# EAGLE board BeanCounter-Panel-for-3DM (EAGLE 9.6.2), part 1 of 2
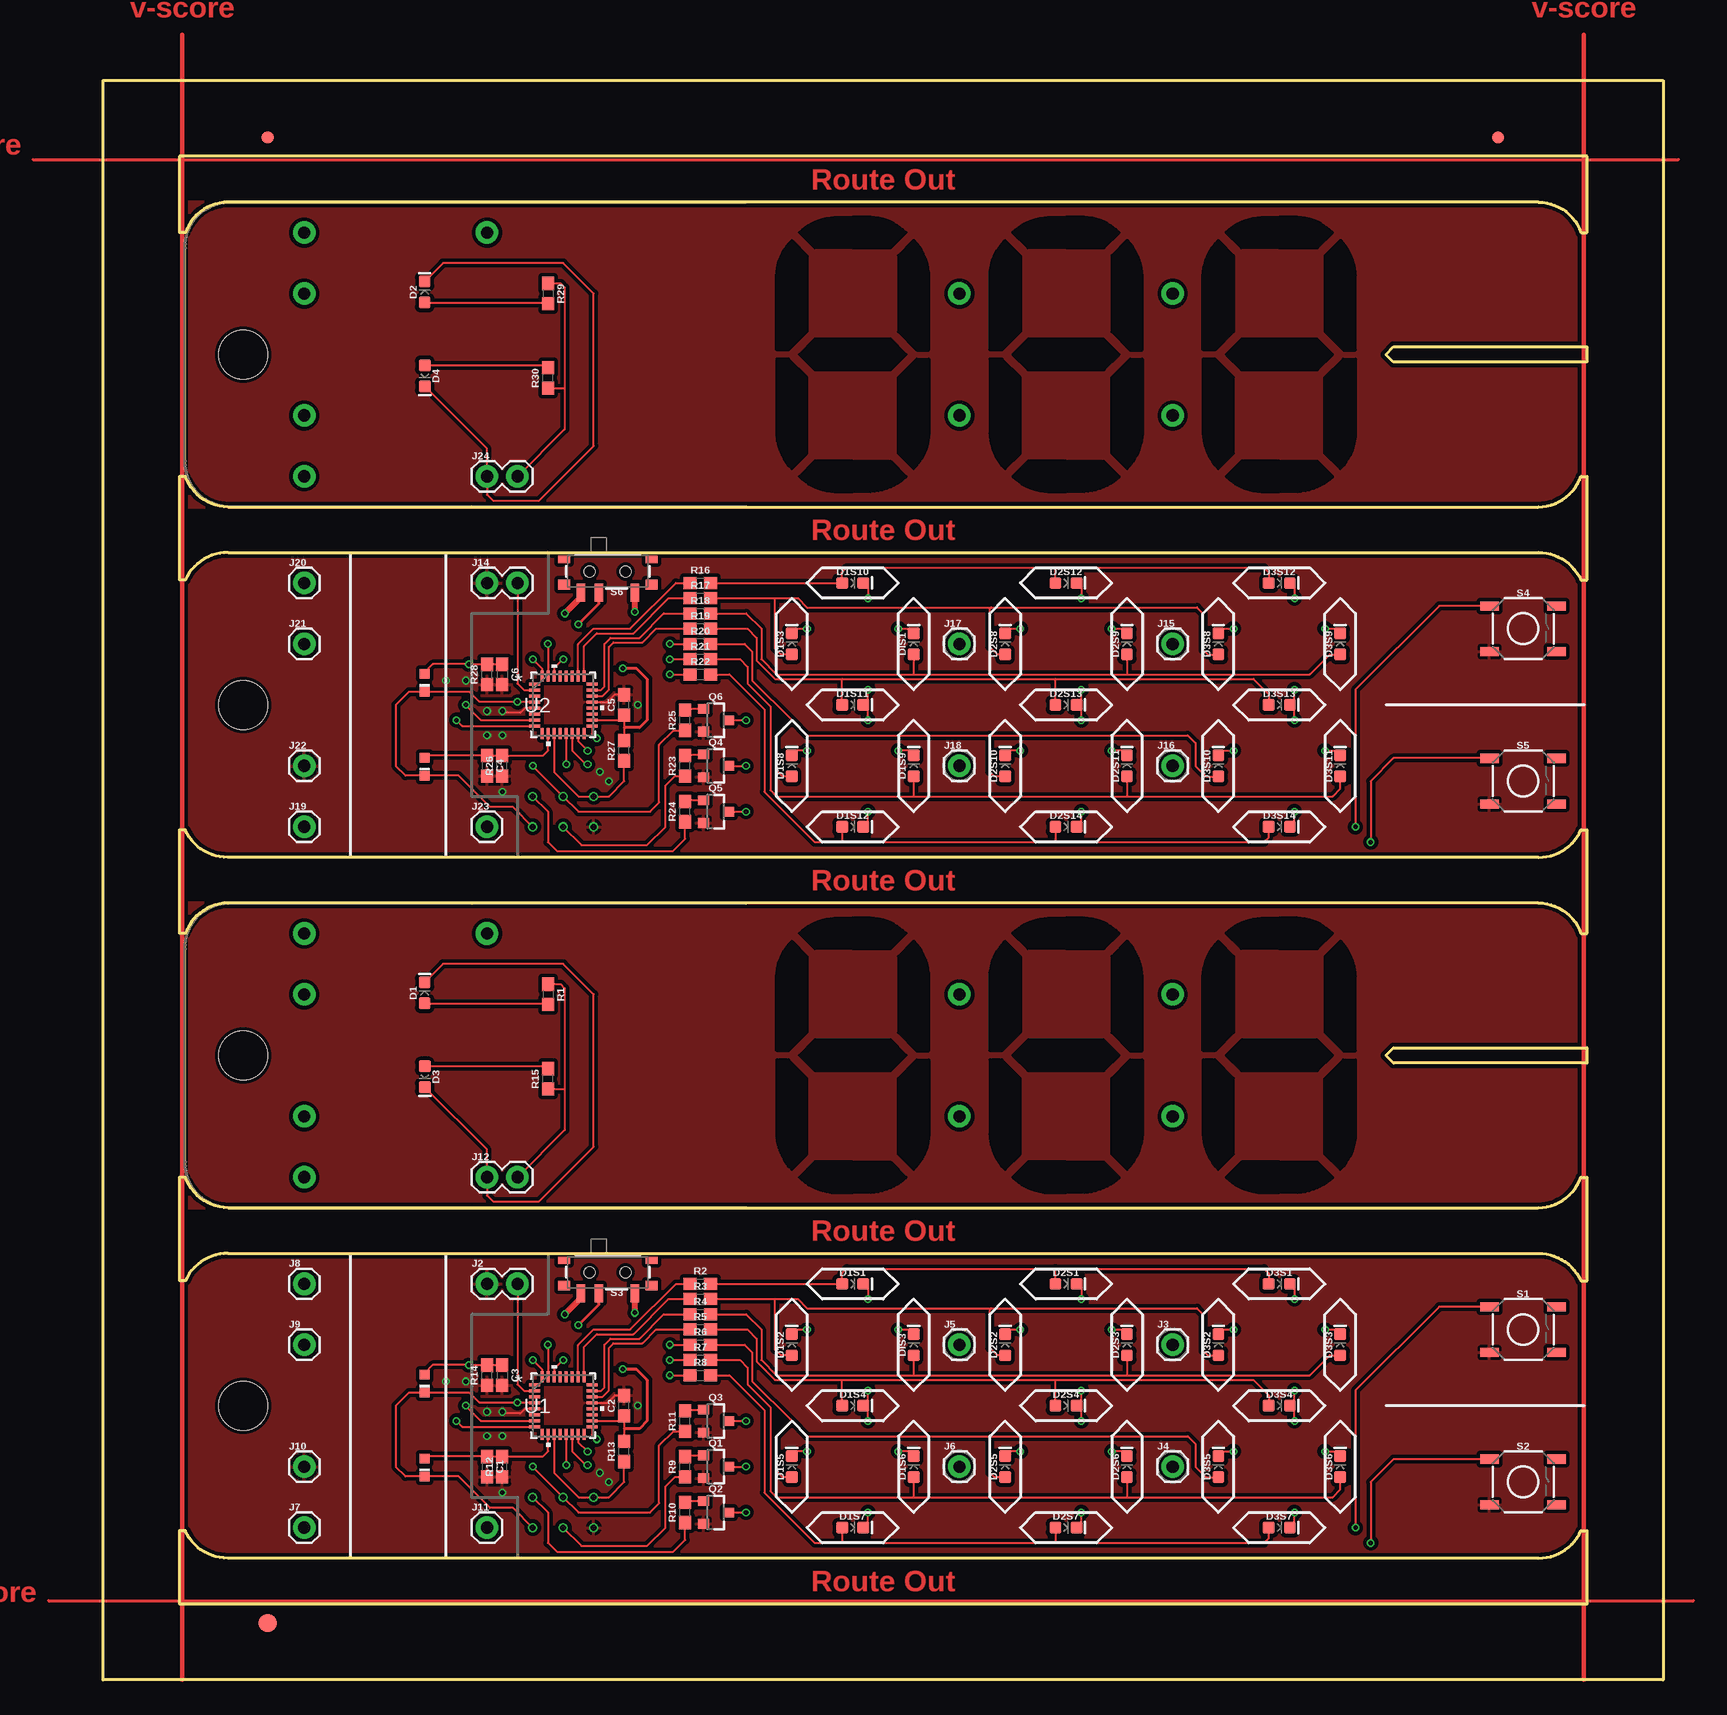
[diagram p0: board, top side]
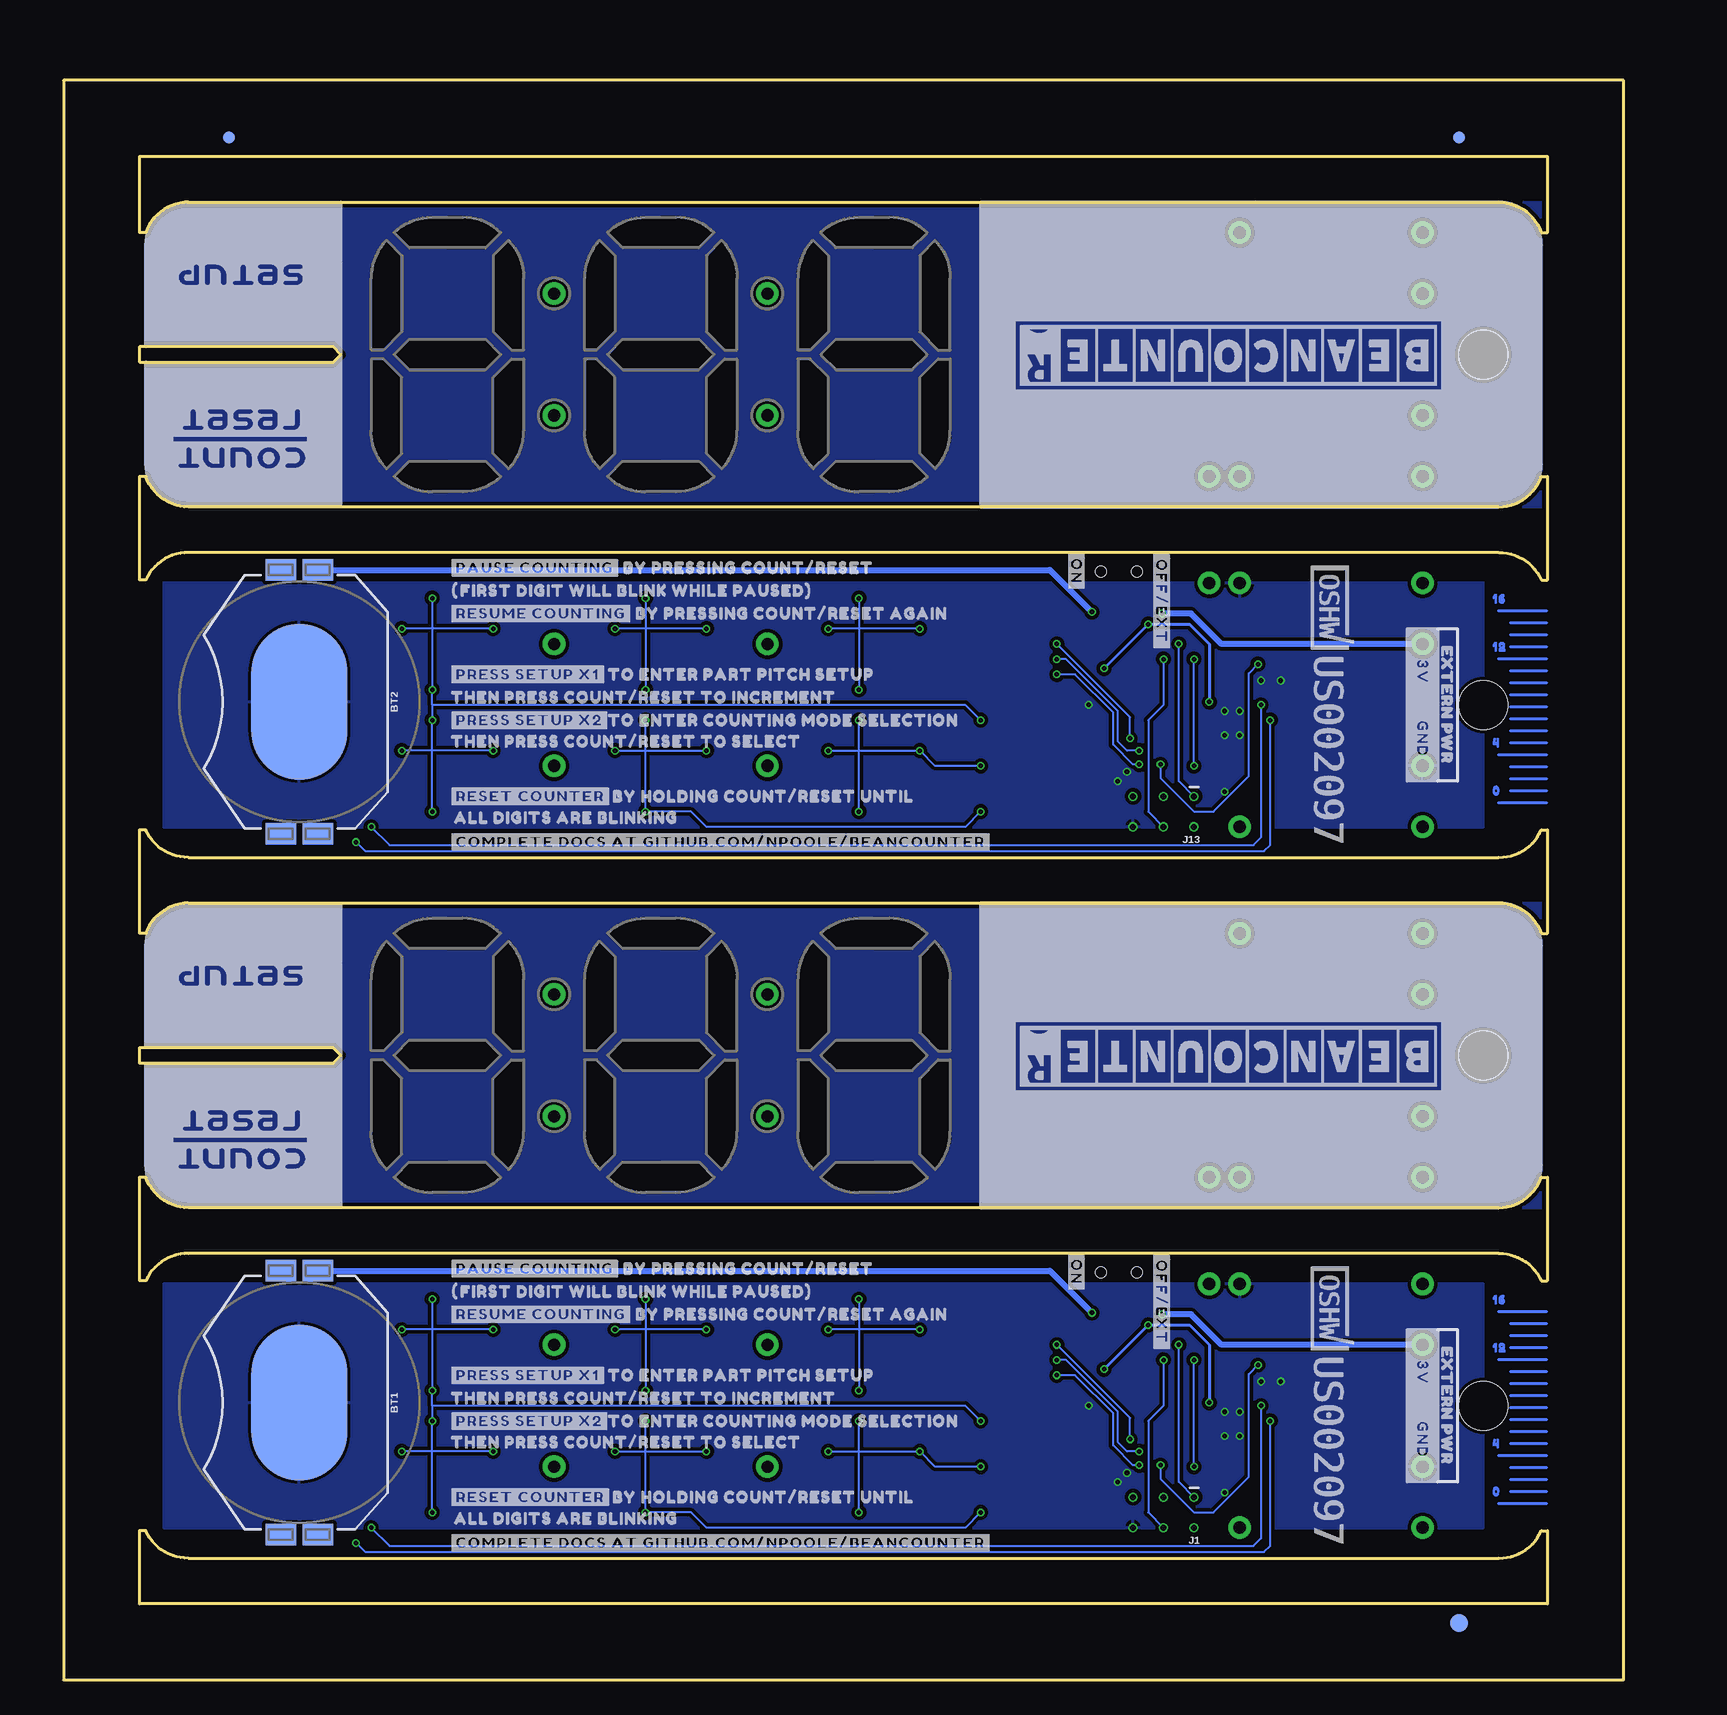
[diagram p1: board, bottom side, seen from below]

Size 130.05 x 133.35 mm. Coordinates in mm from the lower left corner, seen from the top.
Outline: 30.73,39.37 53.59,39.37
Outline: 53.59,64.77 30.73,64.77
Outline: 30.73,97.79 53.59,97.79
Outline: 53.59,123.19 30.73,123.19
Outline: 10.41,35.56 119.63,35.56 arc-67 123.19,33.27 123.7,33.27 123.7,41.91 123.19,41.91 arc-70 119.63,39.37 10.41,39.37 arc-70 6.86,41.91 6.35,41.91 6.35,33.27 6.86,33.27 arc-67 10.41,35.56
Outline: 119.63,10.16 10.41,10.16 arc-67 6.86,12.45 6.35,12.45 6.35,6.35 123.7,6.35 123.7,12.45 123.19,12.45 arc-67 119.63,10.16
Outline: 119.63,64.77 10.41,64.77 arc70 6.86,62.23 6.35,62.23 6.35,70.87 6.86,70.87 arc67 10.41,68.58 119.63,68.58 arc67 123.19,70.87 123.7,70.87 123.7,62.23 123.19,62.23 arc70 119.63,64.77
Outline: 123.7,51.44 107.57,51.44 106.93,52.07 107.57,52.7 123.7,52.7 123.7,51.44
Outline: 10.41,93.98 119.63,93.98 arc-67 123.19,91.69 123.7,91.69 123.7,100.33 123.19,100.33 arc-70 119.63,97.79 10.41,97.79 arc-70 6.86,100.33 6.35,100.33 6.35,91.69 6.86,91.69 arc-67 10.41,93.98
Outline: 119.63,123.19 10.41,123.19 arc70 6.86,120.65 6.35,120.65 6.35,127 123.7,127 123.7,120.65 123.19,120.65 arc70 119.63,123.19
Outline: 123.7,109.85 107.57,109.85 106.93,110.49 107.57,111.12 123.7,111.12 123.7,109.85
Outline: 130.05,0 0,0 0,133.35 130.05,133.35 130.05,0
Copper layers (1*16): Top 0.035mm / dielectric 30mil / Bottom 0.035mm
Design rules "CombinedPanelDFM": minimum track width 5mil, minimum drill 0.3mm, track to track 5mil, track to pad 5mil, pad to pad 5mil, via to via 5mil, smd to smd 5mil, copper to edge 7mil, drill to drill 7mil, minimum pad ring 5mil, minimum via ring 5mil, stop-mask expansion 4mil, vias tented up to drill 25mil, thermal gap 10mil
Holes 4.06 mm at 11.68,22.86 11.68,52.07 11.68,81.28 11.68,110.49

## Footprints (pad centres in the part's own frame; a part is rotated, then mirrored left to right if it is on the bottom)
BATTCON_20MM_4LEGS_OVERPASTE_INNER = smd 1.778 x 2.54: 1 -11,1.55; 3 11,1.55; P$1 -11,-1.55; P$2 11,-1.55 | smd 13 x 8: 2 0,0
0603 = smd 1.1 x 1: 1 -0.85,0; 2 0.85,0
LED-0603 = smd 1 x 1: A -0.877,0; C 0.877,0
FIDUCIAL-1X2 = smd 1 x 1: 1 0,0
FIDUCIAL-1.5X3 = smd 1.5 x 1.5: 1 0,0
2X3_TEST_POINTS = drill 0.508: 1 -2.54,-1.27; 2 -2.54,1.27; 3 0,-1.27; 4 0,1.27; 5 2.54,-1.27; 6 2.54,1.27
1X02 = drill 1.016 pad 1.88: 1 0,0; 2 2.54,0
1X01 = drill 1.016 pad 1.88: 1 0,0
SOT23-3 = smd 0.8 x 0.9: 1 -0.95,-1; 2 0.95,-1; 3 0,1.1
TACTILE_SWITCH_SMD_5.2MM = smd 1.524 x 0.762: 1 -2.794,1.905; 2 2.794,1.905; 3 -2.794,-1.905; 4 2.794,-1.905
SWITCH_SPST_SMD_A = smd 0.7 x 1.5: 1 -2.25,-1.75; 2 -0.75,-1.75; 3 2.25,-1.75 | smd 1 x 0.6: GND1 -3.65,1; GND3 3.65,1 | smd 1 x 0.8: GND2 -3.65,-1.1; GND4 3.65,-1.1 | hole 0.9: -1.5,0; 1.5,0
32M1-A_ATM = smd 0.914 x 0.254: 1 -2.4,1.75; 2 -2.4,1.25; 3 -2.4,0.75; 4 -2.4,0.25; 5 -2.4,-0.25; 6 -2.4,-0.75; 7 -2.4,-1.25; 8 -2.4,-1.75; 17 2.4,-1.75; 18 2.4,-1.25; 19 2.4,-0.75; 20 2.4,-0.25; 21 2.4,0.25; 22 2.4,0.75; 23 2.4,1.25; 24 2.4,1.75 | smd 0.254 x 0.914: 9 -1.75,-2.4; 10 -1.25,-2.4; 11 -0.75,-2.4; 12 -0.25,-2.4; 13 0.25,-2.4; 14 0.75,-2.4; 15 1.25,-2.4; 16 1.75,-2.4; 25 1.75,2.4; 26 1.25,2.4; 27 0.75,2.4; 28 0.25,2.4; 29 -0.25,2.4; 30 -0.75,2.4; 31 -1.25,2.4; 32 -1.75,2.4
HARVATEK_DETECTOR = smd 0.8 x 0.8: P$1 0,0.75; P$2 0,-0.75

## Placement (x,y rotation side)
BT1  [BATTCON_20MM_4LEGS_OVERPASTE_INNER]  110.39,23.12 270 bottom
BT2  [BATTCON_20MM_4LEGS_OVERPASTE_INNER]  110.39,81.54 270 bottom
C1  0.1uF  [0603]  32,17.78 270 top
C2  0.1uF  [0603]  43.43,22.86 90 top
C3  0.1uF  [0603]  33.27,25.4 270 top
C4  0.1uF  [0603]  32,76.2 270 top
C5  0.1uF  [0603]  43.43,81.28 90 top
C6  0.1uF  [0603]  33.27,83.82 270 top
D1  IR LED  [LED-0603]  26.8,57.28 90 top
D1S1  [LED-0603]  62.48,33.02 0 top
D1S2  [LED-0603]  57.4,27.94 90 top
D1S3  [LED-0603]  57.4,86.36 90 top
D1S4  [LED-0603]  62.48,22.86 0 top
D1S5  [LED-0603]  57.4,17.78 90 top
D1S6  [LED-0603]  67.56,17.78 90 top
D1S7  [LED-0603]  62.48,12.7 0 top
D1S8  [LED-0603]  57.4,76.2 90 top
D1S9  [LED-0603]  67.56,76.2 90 top
D1S10  [LED-0603]  62.48,91.44 0 top
D1S11  [LED-0603]  62.48,81.28 0 top
D1S12  [LED-0603]  62.48,71.12 0 top
D2  IR LED  [LED-0603]  26.8,115.7 90 top
D2S1  [LED-0603]  80.26,33.02 0 top
D2S2  [LED-0603]  75.18,27.94 90 top
D2S3  [LED-0603]  85.34,27.94 90 top
D2S4  [LED-0603]  80.26,22.86 0 top
D2S5  [LED-0603]  75.18,17.78 90 top
D2S6  [LED-0603]  85.34,17.78 90 top
D2S7  [LED-0603]  80.26,12.7 0 top
D2S8  [LED-0603]  75.18,86.36 90 top
D2S9  [LED-0603]  85.34,86.36 90 top
D2S10  [LED-0603]  75.18,76.2 90 top
D2S11  [LED-0603]  85.34,76.2 90 top
D2S12  [LED-0603]  80.26,91.44 0 top
D2S13  [LED-0603]  80.26,81.28 0 top
D2S14  [LED-0603]  80.26,71.12 0 top
D3  IR LED  [LED-0603]  26.81,50.29 270 top
D3S1  [LED-0603]  98.04,33.02 0 top
D3S2  [LED-0603]  92.96,27.94 90 top
D3S3  [LED-0603]  103.12,27.94 90 top
D3S4  [LED-0603]  98.04,22.86 0 top
D3S5  [LED-0603]  92.96,17.78 90 top
D3S6  [LED-0603]  103.12,17.78 90 top
D3S7  [LED-0603]  98.04,12.7 0 top
D3S8  [LED-0603]  92.96,86.36 90 top
D3S9  [LED-0603]  103.12,86.36 90 top
D3S10  [LED-0603]  92.96,76.2 90 top
D3S11  [LED-0603]  103.12,76.2 90 top
D3S12  [LED-0603]  98.04,91.44 0 top
D3S13  [LED-0603]  98.04,81.28 0 top
D3S14  [LED-0603]  98.04,71.12 0 top
D4  IR LED  [LED-0603]  26.81,108.71 270 top
DIS1  [LED-0603]  67.56,86.36 90 top
DIS3  [LED-0603]  67.56,27.94 90 top
E$1  [FIDUCIAL-1X2]  13.72,128.59 0 top
E$2  [FIDUCIAL-1X2]  13.72,128.59 0 bottom
E$3  [FIDUCIAL-1X2]  116.27,128.59 0 top
E$4  [FIDUCIAL-1X2]  116.27,128.59 0 bottom
E$5  [FIDUCIAL-1.5X3]  13.72,4.76 0 top
E$6  [FIDUCIAL-1.5X3]  13.72,4.76 0 bottom
J1  AVR_SPI_PROG_3X2TESTPOINTS  [2X3_TEST_POINTS]  38.35,13.97 180 bottom
J2  [1X02]  32,33.02 0 top
J3  [1X01]  89.15,27.94 0 top
J4  [1X01]  89.15,17.78 0 top
J5  [1X01]  71.37,27.94 0 top
J6  [1X01]  71.37,17.78 0 top
J7  [1X01]  16.76,12.7 0 top
J8  [1X01]  16.76,33.02 0 top
J9  [1X01]  16.76,27.94 0 top
J10  [1X01]  16.76,17.78 0 top
J11  [1X01]  32,12.7 0 top
J12  [1X02]  32,41.91 0 top
J13  AVR_SPI_PROG_3X2TESTPOINTS  [2X3_TEST_POINTS]  38.35,72.39 180 bottom
J14  [1X02]  32,91.44 0 top
J15  [1X01]  89.15,86.36 0 top
J16  [1X01]  89.15,76.2 0 top
J17  [1X01]  71.37,86.36 0 top
J18  [1X01]  71.37,76.2 0 top
J19  [1X01]  16.76,71.12 0 top
J20  [1X01]  16.76,91.44 0 top
J21  [1X01]  16.76,86.36 0 top
J22  [1X01]  16.76,76.2 0 top
J23  [1X01]  32,71.12 0 top
J24  [1X02]  32,100.33 0 top
Q1  220mA/50V/3.5Ω  [SOT23-3]  51.05,17.78 270 top
Q2  220mA/50V/3.5Ω  [SOT23-3]  51.05,13.97 270 top
Q3  220mA/50V/3.5Ω  [SOT23-3]  51.05,21.59 270 top
Q4  220mA/50V/3.5Ω  [SOT23-3]  51.05,76.2 270 top
Q5  220mA/50V/3.5Ω  [SOT23-3]  51.05,72.39 270 top
Q6  220mA/50V/3.5Ω  [SOT23-3]  51.05,80.01 270 top
R1  1k  [0603]  37.08,57.15 270 top
R2  33  [0603]  49.78,33.02 0 top
R3  33  [0603]  49.78,31.75 0 top
R4  33  [0603]  49.78,30.48 0 top
R5  33  [0603]  49.78,29.21 0 top
R6  33  [0603]  49.78,27.94 0 top
R7  33  [0603]  49.78,26.67 0 top
R8  33  [0603]  49.78,25.4 0 top
R9  1k  [0603]  48.51,17.78 90 top
R10  1k  [0603]  48.51,13.97 90 top
R11  1k  [0603]  48.51,21.59 90 top
R12  1k  [0603]  33.27,17.78 90 top
R13  1k  [0603]  43.43,19.05 90 top
R14  1k  [0603]  32,25.4 90 top
R15  1k  [0603]  37.1,50.11 90 top
R16  33  [0603]  49.78,91.44 0 top
R17  33  [0603]  49.78,90.17 0 top
R18  33  [0603]  49.78,88.9 0 top
R19  33  [0603]  49.78,87.63 0 top
R20  33  [0603]  49.78,86.36 0 top
R21  33  [0603]  49.78,85.09 0 top
R22  33  [0603]  49.78,83.82 0 top
R23  1k  [0603]  48.51,76.2 90 top
R24  1k  [0603]  48.51,72.39 90 top
R25  1k  [0603]  48.51,80.01 90 top
R26  1k  [0603]  33.27,76.2 90 top
R27  1k  [0603]  43.43,77.47 90 top
R28  1k  [0603]  32,83.82 90 top
R29  1k  [0603]  37.08,115.57 270 top
R30  1k  [0603]  37.1,108.53 90 top
S1  MOMENTARY-SWITCH-SPST-SMD-5.2MM-TALL  [TACTILE_SWITCH_SMD_5.2MM]  118.36,29.21 0 top
S2  MOMENTARY-SWITCH-SPST-SMD-5.2MM-TALL  [TACTILE_SWITCH_SMD_5.2MM]  118.36,16.51 0 top
S3  [SWITCH_SPST_SMD_A]  42.06,33.99 0 top
S4  MOMENTARY-SWITCH-SPST-SMD-5.2MM-TALL  [TACTILE_SWITCH_SMD_5.2MM]  118.36,87.63 0 top
S5  MOMENTARY-SWITCH-SPST-SMD-5.2MM-TALL  [TACTILE_SWITCH_SMD_5.2MM]  118.36,74.93 0 top
S6  [SWITCH_SPST_SMD_A]  42.06,92.41 0 top
U1  ATTINY861V-10MU  [32M1-A_ATM]  38.35,22.86 0 top
U2  ATTINY861V-10MU  [32M1-A_ATM]  38.35,81.28 0 top
U$1  [OSHWBC#SVG0]  24.89,34.42 270 bottom
U$2  [EXTERN_PWR0]  14.73,22.86 270 bottom
U$3  [#PAUSE_COUNTING#0]  98.04,34.29 0 bottom
U$4  [#PRESS_SETUP_X1#0]  98.04,25.4 0 bottom
U$5  [00]  11.44,15.7 0 bottom
U$6  [#_3V#0]  16.76,27.69 270 bottom
U$7  [#_GND#0]  16.76,22.61 270 bottom
U$8  [THEN_PRESS_COUNT#RESET_TO_INCREMENT0]  98.42,23.5 0 bottom
U$9  [BY_PRESSING_COUNT#RESET0]  84.07,34.29 0 bottom
U$10  [FIRST_DIGIT_WILL_BLINK_WHILE_PAUSED#_0]  97.66,32.39 0 bottom
U$11  [#_0]  96.52,32.39 180 bottom
U$12  [#RESUME_COUNTING#0]  98.04,30.48 0 bottom
U$13  [BY_PRESSING_COUNT#RESET_AGAIN0]  83.06,30.48 0 bottom
U$14  [TO_ENTER_PART_PITCH_SETUP0]  85.34,25.4 0 bottom
U$15  [#PRESS_SETUP_X2#0]  98.04,21.59 0 bottom
U$16  [TO_ENTER_COUNTING_MODE_SELECTION0]  85.34,21.59 0 bottom
U$17  [THEN_PRESS_COUNT#RESET_TO_SELECT0]  98.42,19.81 0 bottom
U$18  [#RESET_COUNTER#0]  98.04,15.24 0 bottom
U$19  [BY_HOLDING_COUNT#RESET_UNTIL0]  84.96,15.24 0 bottom
U$20  [40]  11.44,19.7 0 bottom
U$21  [120]  11.44,27.7 0 bottom
U$22  [160]  11.44,31.7 0 bottom
U$23  [#ON#0]  45.61,32.25 270 bottom
U$24  [#OFF#EXT#0]  38.52,27.29 270 bottom
U$25  [ALL_DIGITS_ARE_BLINKING0]  98.17,13.46 0 bottom
U$26  [#COMPLETE_DOCS_AT_GITHUB#COM#NPOOLE#BEANCOUNTER#0]  98.04,11.43 0 bottom
U$27  [#COUNT#0]  115.32,43.43 180 bottom
U$28  [#RESET#0]  115.32,46.61 180 bottom
U$29  [#SETUP#0]  115.32,58.67 180 bottom
U$30  [LOGO#SVG0]  15.49,54.61 180 bottom
U$31  B19H1PT  [HARVATEK_DETECTOR]  26.8,17.72 180 top
U$32  B19H1PT  [HARVATEK_DETECTOR]  26.8,24.7 180 top
U$33  [#_3V#0]  16.76,86.11 270 bottom
U$34  [#_GND#0]  16.76,81.03 270 bottom
U$35  [00]  11.44,74.12 0 bottom
U$36  [40]  11.44,78.12 0 bottom
U$37  [120]  11.44,86.12 0 bottom
U$38  [160]  11.44,90.12 0 bottom
U$39  [#ON#0]  45.61,90.66 270 bottom
U$40  [#OFF#EXT#0]  38.52,85.71 270 bottom
U$41  [OSHWBC#SVG0]  24.89,92.84 270 bottom
U$42  [EXTERN_PWR0]  14.73,81.28 270 bottom
U$43  [#PAUSE_COUNTING#0]  98.04,92.71 0 bottom
U$44  [BY_PRESSING_COUNT#RESET0]  84.07,92.71 0 bottom
U$45  [FIRST_DIGIT_WILL_BLINK_WHILE_PAUSED#_0]  97.66,90.8 0 bottom
U$46  [#_0]  96.52,90.8 180 bottom
U$47  [#RESUME_COUNTING#0]  98.04,88.9 0 bottom
U$48  [BY_PRESSING_COUNT#RESET_AGAIN0]  83.06,88.9 0 bottom
U$49  [#PRESS_SETUP_X1#0]  98.04,83.82 0 bottom
U$50  [TO_ENTER_PART_PITCH_SETUP0]  85.34,83.82 0 bottom
U$51  [THEN_PRESS_COUNT#RESET_TO_INCREMENT0]  98.42,81.91 0 bottom
U$52  [#PRESS_SETUP_X2#0]  98.04,80.01 0 bottom
U$53  [TO_ENTER_COUNTING_MODE_SELECTION0]  85.34,80.01 0 bottom
U$54  [THEN_PRESS_COUNT#RESET_TO_SELECT0]  98.42,78.23 0 bottom
U$55  [#RESET_COUNTER#0]  98.04,73.66 0 bottom
U$56  [BY_HOLDING_COUNT#RESET_UNTIL0]  84.96,73.66 0 bottom
U$57  [ALL_DIGITS_ARE_BLINKING0]  98.17,71.88 0 bottom
U$58  [#COMPLETE_DOCS_AT_GITHUB#COM#NPOOLE#BEANCOUNTER#0]  98.04,69.85 0 bottom
U$59  [#COUNT#0]  115.32,101.85 180 bottom
U$60  [#RESET#0]  115.32,105.03 180 bottom
U$61  [#SETUP#0]  115.32,117.09 180 bottom
U$62  [LOGO#SVG0]  15.49,113.03 180 bottom
U$63  B19H1PT  [HARVATEK_DETECTOR]  26.8,76.14 180 top
U$64  B19H1PT  [HARVATEK_DETECTOR]  26.8,83.12 180 top

## Library data of the parts
BT1 BT2 = SparkFun-Batteries
C1-C6 = SparkFun-Capacitors; PROD_ID: CAP-00810
D1-D4 = SparkFun-LED; PROD_ID: DIO-14125
D1S1-D1S12 D2S1-D2S14 D3S1-D3S14 DIS1 DIS3 = SparkFun-LED
E$1-E$4 = SparkFun-Aesthetics
E$5 E$6 = SparkFun-Retired
J1-J24 = SparkFun-Connectors
Q1-Q6 = SparkFun-DiscreteSemi; PROD_ID: TRANS-00830
R1 R9-R15 R23-R30 = SparkFun-Resistors; PROD_ID: RES-07856
R2-R8 R16-R22 = SparkFun-Resistors; PROD_ID: RES-08270
S1 S2 S4 S5 = SparkFun-Switches; PROD_ID: SWCH-14139
S3 S6 = SparkFun-Switches; PROD_ID: SWCH-10651; SF_SKU: COM-10860
U1 U2 = Melodica; COPYRIGHT: Copyright (C) 2021 Ultra Librarian. All rights reserved.; DIGI-KEY_PART_NUMBER_1: ATTINY861V-10MU-ND; DIGI-KEY_PART_NUMBER_2: 2156-ATTINY861V-10MU-ND; MANUFACTURER_PART_NUMBER: ATTINY861V-10MU; MFR_NAME: Microchip
U$1-U$29 U$33-U$61 = output
U$30 U$62 = logo
U$31 U$32 U$63 U$64 = IR

## Nets
0: R2.1 U1.26
1: R3.1 U1.25
2: R4.1 U1.23
3: R5.1 U1.22
4: R6.1 U1.17
5: R7.1 U1.15
6: R8.1 U1.14
7: R16.1 U2.26
8: R17.1 U2.25
8/COPI: J1.4 R9.1 U1.30
8/COPI1: J13.4 R23.1 U2.30
9: R18.1 U2.23
9/CIPO: J1.1 R10.1 U1.31
9/CIPO1: J13.1 R24.1 U2.31
10: R19.1 U2.22
10/SCK: J1.3 R11.1 U1.32
10/SCK1: J13.3 R25.1 U2.32
11: J2.2 U1.2
12: S1.1 U1.7
13: S2.1 U1.8
14: R20.1 U2.17
15: R21.1 U2.15
16: R22.1 U2.14
17: J14.2 U2.2
18: S4.1 U2.7
19: S5.1 U2.8
!RESET: J1.5 R13.1 U1.11
!RESET1: J13.5 R27.1 U2.11
GND: BT1.2 C1.2 C2.2 C3.2 J1.6 J2.1 J10.1 Q1.2 Q2.2 Q3.2 R12.1 R14.1 S1.3 S2.3 U1.5 U1.21
GND1: BT2.2 C4.2 C5.2 C6.2 J13.6 J14.1 J22.1 Q4.2 Q5.2 Q6.2 R26.1 R28.1 S4.3 S5.3 U2.5 U2.21
IR_DETECTOR_A: C1.1 R12.2 U1.10 U$31.P$2
IR_DETECTOR_A1: C4.1 R26.2 U2.10 U$63.P$2
IR_DETECTOR_B: C3.1 R14.2 U1.13 U$32.P$2
IR_DETECTOR_B1: C6.1 R28.2 U2.13 U$64.P$2
N$1: BT1.1 S3.3
N$4: D1S1.C D1S2.C D1S4.C D1S5.C D1S6.C D1S7.C DIS3.C Q1.3
N$8: Q2.1 R10.2
N$9: Q1.1 R9.2
N$11: D2S1.C D2S2.C D2S3.C D2S4.C D2S5.C D2S6.C D2S7.C Q2.3
N$13: Q3.1 R11.2
N$14: D3S1.C D3S2.C D3S3.C D3S4.C D3S5.C D3S6.C D3S7.C Q3.3
N$20: Q4.1 R23.2
N$21: D1S3.C D1S8.C D1S9.C D1S10.C D1S11.C D1S12.C DIS1.C Q4.3
N$22: D2S8.C D2S9.C D2S10.C D2S11.C D2S12.C D2S13.C D2S14.C Q5.3
N$30: D3S8.C D3S9.C D3S10.C D3S11.C D3S12.C D3S13.C D3S14.C Q6.3
N$31: D3.A R15.2
N$32: D1.A R1.2
N$33: Q5.1 R24.2
N$34: Q6.1 R25.2
N$35: BT2.1 S6.3
N$44: J12.2 R1.1 R15.1
N$51: D1.C D3.C J12.1
N$121: J24.2 R29.1 R30.1
N$122: D2.C D4.C J24.1
N$189: D4.A R30.2
N$190: D2.A R29.2
SEG1: D1S1.A D2S1.A D3S1.A R2.2
SEG2: D1S2.A D2S2.A D3S2.A R3.2
SEG3: D2S3.A D3S3.A DIS3.A R4.2
SEG4: D1S4.A D2S4.A D3S4.A R5.2
SEG5: D1S5.A D2S5.A D3S5.A R6.2
SEG6: D1S6.A D2S6.A D3S6.A R7.2
SEG7: D1S7.A D2S7.A D3S7.A R8.2
SEG8: D1S10.A D2S12.A D3S12.A R16.2
SEG9: D1S11.A D2S13.A D3S13.A R19.2
SEG10: D1S3.A D2S8.A D3S8.A R17.2
SEG11: D2S9.A D3S9.A DIS1.A R18.2
SEG12: D1S9.A D2S11.A D3S11.A R21.2
SEG13: D1S8.A D2S10.A D3S10.A R20.2
SEG14: D1S12.A D2S14.A D3S14.A R22.2
V_BATT: C2.1 J1.2 R13.2 S3.2 U1.4 U1.18 U$31.P$1 U$32.P$1
V_BATT1: C5.1 J13.2 R27.2 S6.2 U2.4 U2.18 U$63.P$1 U$64.P$1
V_EXT: J9.1 S3.1
V_EXT1: J21.1 S6.1